# Altium PCB Optical Compressor.PcbDoc (part 1 of 2)
Units mm, origin at the board's own origin, x right, y up, seen from the top; angles counter-clockwise.
Board outline 100 x 100 mm, 2 copper layers (Top Layer, Bottom Layer); 101 components, 65 nets, 289 pads, 0 vias.
Unrouted connection lines stored in the file: 219.
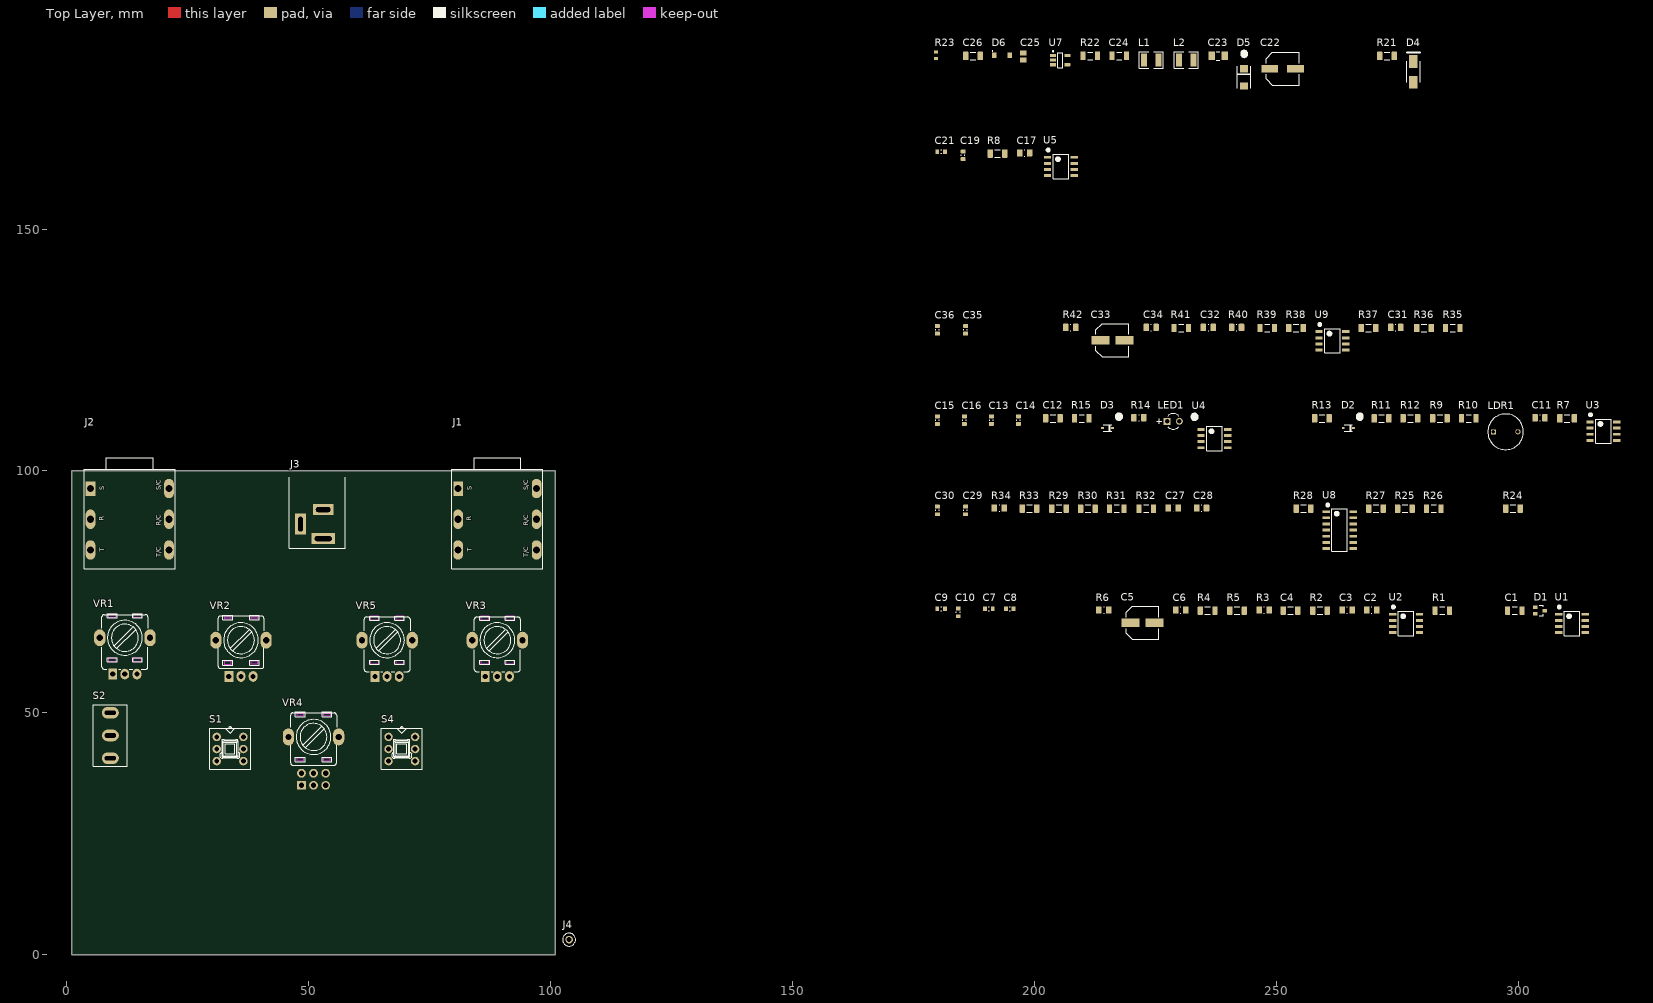
[diagram p0: Top Layer view]
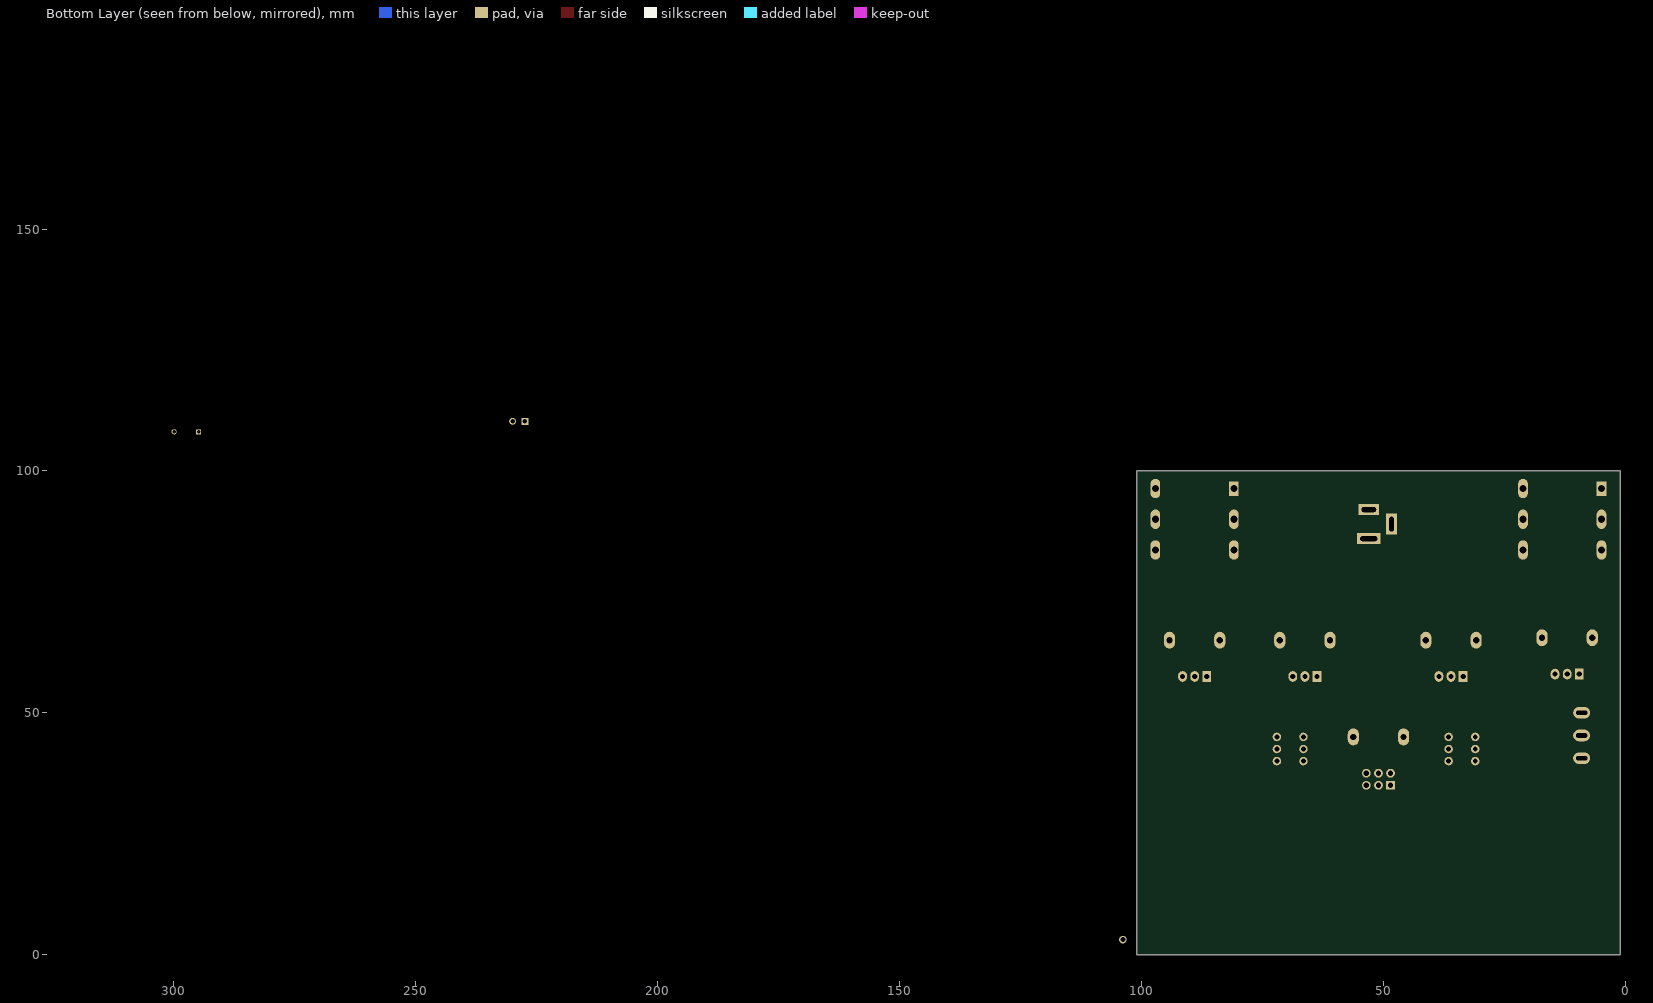
[diagram p1: Bottom Layer view, seen from below]

## Layer stack, top to bottom
Top Solder: solder mask 0.0102, Solder Resist, Dk 3.5
Top Layer: signal copper 0.0356
Dielectric 1: dielectric 0.32, FR-4, Dk 4.8
Bottom Layer: signal copper 0.0356
Bottom Solder: solder mask 0.0102, Solder Resist, Dk 3.5

## Board outline
1,0 101,0 101,100 1,100

## Design rules (kind name [scope] priority, off if disabled: settings)
Clearance [All] p1: gap=0.5 ignorepadtopadclearanceinfootprint=FALSE
PlaneConnect [All] p1: pad.planeconnectstyle=Relief pad.reliefexpansion=0.508 pad.reliefentries=4 pad.reliefconductorwidth=0.254 pad.reliefairgap=0.254 via.planeconnectstyle=NoConnect via.reliefexpansion=0.508 via.reliefentries=4 via.reliefconductorwidth=0.254 via.reliefairgap=0.254
PolygonConnect [All] p1: thpad.connectstyle=Relief thpad.reliefconductorwidth=0.254 thpad.reliefentries=4 thpad.polygonreliefangle="90 Angle" thpad.airgapwidth=0.254 smdpad.connectstyle=Relief smdpad.reliefconductorwidth=0.254 smdpad.reliefentries=4 smdpad.polygonreliefangle="90 Angle" smdpad.airgapwidth=0.254 via.connectstyle=NoConnect via.reliefconductorwidth=0.254 via.reliefentries=4 via.polygonreliefangle="90 Angle" via.airgapwidth=0.254
RoutingVias [All] p1: holewidth=0.6 width=0.3 viastyle="Through Hole" minholewidth=0.6 minwidth=0.3 maxholewidth=0.6 maxwidth=0.3
SolderMaskExpansion [All] p1: expansion=0.102 istentingtop=FALSE
UnRoutedNet [All] p1: checkbadconnections=TRUE
Width [All] p1: maxlimit=0.5 minlimit=0.5 preferedwidth=0.5
28 further rules are at their usual default settings.

## Classes and differential pairs
component class S6: C22 C23 C24 C25 C26 D4 D5 D6 J3 L1 L2 R21 R22 R23 U7
component class S5: C17 C19 C21 J2 R8 U5 VR3
component class S4: C31 C32 C33 C34 C35 C36 R35 R36 R37 R38 R39 R40 R41 R42 U9 VR5
component class S3: C11 C12 C13 C14 C15 C16 D2 D3 LDR1 LED1 R7 R9 R10 R11 R12 R13 R14 R15 U3 U4 VR2
component class S2: C27 C28 C29 C30 R24 R25 R26 R27 R28 R29 R30 R31 R32 R33 R34 S4 U8 VR4
component class S1: C1 C2 C3 C4 C5 C6 C7 C8 C9 C10 D1 J1 R1 R2 R3 R4 R5 R6 S2 U1 U2 VR1
component class Main: S1

## Components (designator, comment, footprint, x,y, rotation, side; value= is the part's Value field where it differs from the comment)
C1 "Cap 1206 100nF" 1206-CAP 299.339,71.12 r0 top value=100n
C2 "Cap 10nF 0805 C0G" 0805-CAP 269.748,71.247 r0 top
C3 "Cap 10nF 0805 C0G" 0805-CAP 264.668,71.247 r0 top
C4 "Cap 1206 100pF" 1206-CAP 252.984,71.12 r0 top value=100pF
C5 "Cap Pol 220uF" CAPAE6966X80M 222.377,68.58 r0 top value=220uF/25V
C6 "cap 0805 10pF" 0805-CAP 230.251,71.247 r0 top
C7 "Cap 0603 100nF 2" 0603-CAP 190.627,71.501 r0 top value=100n
C8 "Cap 0603 100nF 2" 0603-CAP 194.945,71.501 r0 top value=100n
C9 "Cap 0603 100nF 2" 0603-CAP 180.721,71.501 r0 top value=100n
C10 "Cap 0603 100nF 2" 0603-CAP 184.277,70.739 r90 top value=100n
C11 "Cap 10nF 0805 C0G" 0805-CAP 304.546,110.998 r0 top
C12 "Cap 1206 22uF" 1206-CAP 203.835,110.871 r0 top value=22uF
C13 "Cap 0603 100nF 2" 0603-CAP 191.135,110.49 r90 top value=100n
C14 "Cap 0603 100nF 2" 0603-CAP 196.723,110.49 r90 top value=100n
C15 "Cap 0603 100nF 2" 0603-CAP 179.959,110.49 r90 top value=100n
C16 "Cap 0603 100nF 2" 0603-CAP 185.547,110.49 r90 top value=100n
C17 "Cap 10nF 0805 C0G" 0805-CAP 197.993,165.735 r0 top
C19 "Cap 0603 100nF 2" 0603-CAP 185.293,165.227 r90 top value=100n
C21 "Cap 0603 100nF 2" 0603-CAP 180.721,165.989 r0 top value=100n
C22 "Cap pol 100µF 35V" "E-CAP, SMT, diameter 6.3mm, height 7.7mm" 251.333,183.134 r0 top
C23 "1uF" FP-1206-L_3_2_0_15-W_1_6-IPC_B 237.998,185.801 r0 top
C24 "Cap 1206 22uF 25V" 1206-CAP 217.551,185.801 r0 top value=22uF
C25 "330pF" CAPC2013X145X48LL20T23 197.739,185.674 r90 top
C26 "Cap 1206 22uF" 1206-CAP 187.325,185.801 r0 top value=22uF
C27 "Cap 10nF 0805 C0G" 0805-CAP 228.727,92.329 r0 top
C28 "Cap 10nF 0805 C0G" 0805-CAP 234.569,92.329 r0 top
C29 "Cap 0603 100nF 2" 0603-CAP 185.801,91.821 r90 top value=100n
C30 "Cap 0603 100nF 2" 0603-CAP 179.959,91.821 r90 top value=100n
C31 "Cap 10nF 0805 C0G" 0805-CAP 274.701,129.667 r0 top
C32 "Cap 10nF 0805 C0G" 0805-CAP 235.966,129.667 r0 top
C33 "Cap Pol 220uF" CAPAE6966X80M 216.154,127 r0 top value=220uF/25V
C34 "cap 0805 10pF" 0805-CAP 224.155,129.667 r0 top
C35 "Cap 0603 100nF 2" 0603-CAP 185.801,129.159 r90 top value=100n
C36 "Cap 0603 100nF 2" 0603-CAP 179.959,129.159 r90 top value=100n
D1 "BAT54SWT1G" ONSC-SOT-323-3-419-04_V 304.546,71.12 r0 top
D2 "1N4148WS-7-F" 1N4148WS-7-F 264.922,108.839 r0 top
D3 "1N4148WS-7-F" 1N4148WS-7-F 215.138,108.839 r0 top
D4 "SS14" SS14 278.384,182.499 r90 top
D5 "SML4742-E3/5A" DO-214AC 243.332,179.578 r90 top
D6 "MBR0520-TP" SODFL370X135-2N 193.294,185.928 r0 top
J1 "Jack NMJ6HCD2" "Neutrik Jack metal nut" 89,90 r90 top
J2 "Jack NMJ6HCD2" "Neutrik Jack metal nut" 13,90 r90 top
J3 "DC Jack TH" DC_Jack 53.127,89.374 r270 top
J4 "5001" FP-5001-MFG 103.83,3.1 r0 top
L1 "BCL322515RT-150M-D" "1210 SMD Cap" 224.155,184.912 r0 top
L2 "BCL322515RT-150M-D" "1210 SMD Cap" 231.394,184.912 r0 top
LDR1 "NSL-5910" FB_28C0236-0JW-10 297.434,108.077 r0 top
LED1 "LED 3mm RED" KING-WP710A10QBCD_V 228.727,110.236 r0 top
R1 "Res 1k 1% 1206" 1206-RES 284.353,71.12 r0 top
R2 "Res 1M 1% 1206" 1206-RES 259.08,71.12 r0 top
R3 "Res 0805 330k 1%" 0805-RES 247.523,71.247 r0 top value=330k
R4 "Res 100k 1% 1206" 1206-RES 235.839,71.12 r0 top
R5 "Res 100k 1% 1206" 1206-RES 241.935,71.12 r0 top
R6 "Res 3.3k 1% 0805" 0805-RES 214.376,71.247 r0 top
R7 "Res 100k 1% 1206" 1206-RES 310.134,110.871 r0 top
R8 "Res 100R 1% 1206" 1206-RES 192.405,165.608 r0 top
R9 "Res 100k 1% 1206" 1206-RES 283.845,110.871 r0 top
R10 "Res 100k 1% 1206" 1206-RES 289.814,110.871 r0 top
R11 "Res 33k 0.1% 1206" 1206-RES 271.78,110.871 r0 top
R12 "Res 100k 1% 1206" 1206-RES 277.749,110.871 r0 top
R13 "Res 100k 1% 1206" 1206-RES 259.461,110.871 r0 top
R14 "Res 10k 0.1% 0805" 0805-RES 221.615,110.998 r0 top
R15 "Res 680R 5% 1206" 1206-RES 209.804,110.871 r0 top
R21 "Res 10R 1% 1206" 1206-RES 272.923,185.801 r0 top
R22 "Res 30k 5% 1206" 1206-RES 211.582,185.801 r0 top
R23 "RC0603FR-074K7L" RESC1608X55X25LL10T15 179.705,185.928 r90 top
R24 "Res 5.6k 0.1% 1206" 1206-RES 298.958,92.202 r0 top
R25 "Res 5.6k 0.1% 1206" 1206-RES 276.606,92.202 r0 top
R26 "Res 100R 1% 1206" 1206-RES 282.575,92.202 r0 top
R27 "Res 100R 1% 1206" 1206-RES 270.637,92.202 r0 top
R28 "Res 5.6k 0.1% 1206" 1206-RES 255.651,92.202 r0 top
R29 "Res 3.3k 1% 1206" 1206-RES 205.105,92.202 r0 top
R30 "Res 3.3k 1% 1206" 1206-RES 211.074,92.202 r0 top
R31 "Res 5.6k 0.1% 1206" 1206-RES 217.043,92.202 r0 top
R32 "Res 5.6k 0.1% 1206" 1206-RES 223.139,92.202 r0 top
R33 "Res 5.6k 0.1% 1206" 1206-RES 199.009,92.202 r0 top
R34 "Res 11.3k 1% 0805" 0805-RES 192.786,92.329 r0 top
R35 "Res 10k 0.1% 1206" 1206-RES 286.512,129.54 r0 top
R36 "Res 2.2k 0.1% 1206" 1206-RES 280.543,129.54 r0 top
R37 "Res 1k 0.1% 1206" 1206-RES 269.113,129.54 r0 top
R38 "Res 2.2k 0.1% 1206" 1206-RES 254.127,129.54 r0 top
R39 "Res 10k 0.1% 1206" 1206-RES 248.158,129.54 r0 top
R40 "Res 0805 330k 1%" 0805-RES 241.808,129.667 r0 top value=330k
R41 "Res 2.2k 0.1% 1206" 1206-RES 230.378,129.54 r0 top
R42 "Res 3.3k 1% 0805" 0805-RES 207.518,129.667 r0 top
S1 "Push Vertical Latching" "PUSH VERTICAL DPDT" 33.75,42.5 r0 top
S2 "Switch SPDT toggle" "Switch SPDT" 9,45.3 r0 top
S4 "Push Vertical Latching" "PUSH VERTICAL DPDT" 69.25,42.5 r0 top
U1 "TL072CD" SOIC8-127P600X175-8N 311.15,68.453 r0 top
U2 "OPA1688IDR" SOIC8-127P600X175-8N 276.86,68.453 r0 top
U3 "TL072CD" SOIC8-127P600X175-8N 317.627,108.204 r0 top
U4 "TL072CD" SOIC8-127P600X175-8N 237.236,106.68 r0 top
U5 "OPA1688IDR" SOIC8-127P600X175-8N 205.486,162.941 r0 top
U7 "LM2611BMF/NOPB" DBV0005A_M 205.359,184.912 r0 top
U8 "MC33179D" SOIC14-127P600X175-14N 263.144,87.757 r0 top
U9 "TL072CD" SOIC8-127P600X175-8N 261.62,126.873 r0 top
VR1 "Pot100kC 9mm" "LJV 9mm pot"#1 12,65.5 r0 top value=100kC
VR2 "Pot100kA 9mm" "LJV 9mm pot"#2 36,65 r0 top value=100kA
VR3 "Pot100kC 9mm D-Shaft" "LJV 9mm pot"#1 89,65 r0 top value=100kC
VR4 "Pot100kC DUAL LJV" "LJV 9MM DUAL" 51,45 r0 top value=100kC
VR5 "Pot100kC 9mm" "LJV 9mm pot"#1 66.2,65 r0 top value=100kC

## Footprints (in the part's own frame and the unit in brackets; to place one, negate y for a bottom-side part, rotate by r counter-clockwise, add the part's x,y. Pads: shape width x height; smd on the part's side, far side on the other; paste and mask are expansions set on the pad)
1N4148WS-7-F [mm] "SOD-323, 2-Leads, Body 1.7x1.3mm"
  rect 0.59x0.45 smd: 1(-1.055,0) 2(1.055,0)
  silkscreen extent -0.85,-0.65 3.1,3.13, body extent -0.85,-0.65 0.85,0.65, height 1.2
0603-CAP [mm] "Chip Capacitor, 2-Leads, Body 1.6x0.8mm, IPC Medium Density"
  rrect25% 0.8x1 smd: 1(-0.787,0) 2(0.787,0)
  silkscreen extent -0.1,-0.38 0.1,0.38, body extent -0.85,-0.45 0.85,0.45, height 0.9
0805-CAP [mm] "Chip Capacitor, 2-Leads, Body 2.00x1.25mm, IPC Low Density"
  rrect25% 1.15x1.5 smd: 1(-1.025,0) 2(1.025,0)
  silkscreen extent -0.05,-0.65 0.05,0.65, body extent -1.05,-0.67 1.05,0.68, height 1.35
0805-RES [mm] "Chip Resistor, 2-Leads, Body 2.00x1.25mm, IPC Low Density"
  rrect25% 1.15x1.5 smd: 1(-1.025,0) 2(1.025,0)
  silkscreen extent -0.05,-0.65 0.05,0.65, body extent -1.05,-0.67 1.05,0.68, height 0.6
1206-CAP [mm] "Chip Capacitor, 2-Leads, Body 3,20x1,60mm, IPC Medium Density"
  rrect25% 1.1x1.75 smd: 1(-1.5,0) 2(1.5,0)
  silkscreen extent -0.55,-0.77 0.55,0.77, body extent -1.7,-0.9 1.7,0.9, height 1.8
1206-RES [mm] "Chip Resistor, 2-Leads, Body 3,20x1,60mm, IPC Medium Density"
  rrect25% 1.1x1.75 smd: 1(-1.5,0) 2(1.5,0)
  silkscreen extent -0.55,-0.77 0.55,0.77, body extent -1.65,-0.85 1.65,0.85, height 0.65
"1210 SMD Cap" [mm] "Old footprint"
  rect 1.2x2.7 smd: 1(-1.5,0) 2(1.5,0)
  silkscreen extent -2.5,-1.7 2.5,1.7, body extent -1.6,-1.25 1.6,1.25, height 0.78
CAPAE6966X80M [mm] "Aluminum Electrolytic Capacitor, Body 6,60x6,60x8,00mm, IPC Low Density"
  rect 3.7x1.8 smd: 1(-2.5,0) 2(2.5,0)
  silkscreen extent -3.4,-3.4 3.4,3.4, body extent -3.45,-3.4 3.45,3.4, height 8
CAPC2013X145X48LL20T23 [mm] "Chip Capacitor, 2-Leads, Body 2.00x1.25mm, IPC High Density"
  rect 1.1x1.35 smd: 1(-0.725,0) 2(0.725,0)
  body extent -1.1,-0.72 1.1,0.72, height 1.45
DBV0005A_M [mm] "SOT23, 5-Leads, Body 3.05x1.75mm, Pitch 0.95mm, IPC Low Density"
  rrect15% 1.2x0.65 smd: 1(-1.475,0.95) 2(-1.475,0) 3(-1.475,-0.95) 4(1.475,-0.95) 5(1.475,0.95)
  silkscreen extent -1.6,-1.55 0.5,1.95, body extent -1.42,-1.46 1.42,1.46, height 1.08
DC_Jack [mm]
  rect 2.3x4.8 hole 1 slot 3.5 at 90 deg: 1(3.374,-0.127)
  rect 2.3x4.3 hole 1 slot 3 at 90 deg: 2(-2.626,-0.127)
  rect 4.3x2.3 hole 1 slot 3 at 0 deg: 3(0.374,-4.827)
  silkscreen extent -9.33,-7.11 5.41,4.44, body extent -10.3,-5.01 4.1,4.39, height 11
DO-214AC [mil]
  rect 60x66 smd: 1(0,0) 2(140,0)
  silkscreen extent -20,-55 290,55
"E-CAP, SMT, diameter 6.3mm, height 7.7mm" [mm] "Aluminum Electrolytic Capacitor, Body 6,60x6,60x8,00mm, IPC Medium Density"
  rect 3.45x1.65 smd: 1(-2.675,0) 2(2.675,0)
  silkscreen extent -3.4,-3.4 3.4,3.4, body extent -3.4,-3.4 3.4,3.4, height 8
FB_28C0236-0JW-10 [mm]
  rect 1.06x1.06 hole 0.71: 1(-2.54,0)
  round 1.06 hole 0.71: 2(2.54,0)
  silkscreen extent -3.68,-3.68 3.68,3.68
FP-1206-L_3_2_0_15-W_1_6-IPC_B [mm]
  rect 1.355x1.758 smd paste+0 mask+0: 1(-1.351,0) 2(1.351,0)
  silkscreen extent -0.37,-0.88 0.37,0.88, body extent -2.28,-1.13 2.28,1.13, height 0.25
FP-5001-MFG [mm]
  round 1.57 hole 1.016 paste-1000 mask+0: 1(0,0)
  silkscreen extent -1.35,-1.34 1.35,1.34, body extent -1.45,-1.45 1.45,1.45, height 0.25
KING-WP710A10QBCD_V [mm] "THD, 2-Leads, Dia 3.2mm"
  rect 1.4x1.4 hole 0.889 paste-0.025: 1(-1.27,0)
  round 1.4 hole 0.889 paste-0.025: 2(1.27,0)
  silkscreen extent -3.39,-1.6 1.16,1.6, body extent -1.62,-1.6 1.62,1.6, height 14.1
"LJV 9MM DUAL" [mm]
  rect 1.8x1.8 hole 1.1: 1(-2.5,-10)
  round 1.8 hole 1.1: 2(0,-10) 3(2.5,-10) 4(-2.5,-7.5) 5(0,-7.5) 6(2.5,-7.5)
  oval 2.3x3.5 hole 1.3: 7(-5.2,0) 8(5.2,0)
  Top Layer keep-out region: -2,4.75 -3.5,4.75 -3.5,4.4 -2,4.4
  Top Layer keep-out region: 3.525,4.75 2.025,4.75 2.025,4.4 3.525,4.4
  Top Layer keep-out region: 3.475,-4.375 2,-4.375 2,-4.9 3.475,-4.9
  Top Layer keep-out region: -2.025,-4.4 -3.475,-4.4 -3.475,-4.953 -2.025,-4.953
  silkscreen extent -4.75,-5.85 4.75,5.2, body extent -6.05,-7.8 6.05,4.8, height 23
"LJV 9mm pot"#1 [mm]
  rect 1.8x2.2 hole 1.1: 1(-2.5,-7.5)
  oval 1.8x2.2 hole 1.1: 2(0,-7.5) 3(2.5,-7.5)
  oval 2.3x3.5 hole 1.3: 4(-5.2,0) 5(5.2,0)
  Top Layer keep-out region: 1.751,4.2 3.451,4.2 3.451,4.9 1.751,4.9
  Top Layer keep-out region: -1.75,-4.199 -3.45,-4.199 -3.45,-4.899 -1.75,-4.899
  Top Layer keep-out region: 1.751,-4.899 3.451,-4.899 3.451,-4.199 1.751,-4.199
  Top Layer keep-out region: -1.75,4.9 -3.45,4.9 -3.45,4.2 -1.75,4.2
  silkscreen extent -4.75,-6.5 4.75,5, body extent -6.05,-7.8 6.05,4.8, height 23
"LJV 9mm pot"#2 [mm]
  rect 1.8x2.2 hole 1.1: 1(-2.5,-7.5)
  oval 1.8x2.2 hole 1.1: 2(0,-7.5) 3(2.5,-7.5)
  oval 2.3x3.5 hole 1.3: 4(-5.2,0) 5(5.2,0)
  Top Layer keep-out region: -2.025,-4.4 -3.475,-4.4 -3.475,-4.953 -2.025,-4.953
  Top Layer keep-out region: 3.475,-4.375 2,-4.375 2,-4.9 3.475,-4.9
  Top Layer keep-out region: 3.525,4.75 2.025,4.75 2.025,4.4 3.525,4.4
  Top Layer keep-out region: -2,4.75 -3.5,4.75 -3.5,4.4 -2,4.4
  silkscreen extent -4.75,-5.85 4.75,5.2, body extent -6.05,-7.8 6.05,4.8, height 23
"Neutrik Jack metal nut" [mm] "EMI Screen partno FCR14422"
  rect 3x2 hole 1.5: 1(6.35,8.115)
  oval 4x2 hole 1.5: 2(0,8.115) 3(-6.35,8.115) 4(-6.35,-8.115) 5(0,-8.115) 6(6.35,-8.115)
  silkscreen extent -10.25,-9.39 12.7,9.42, body extent -13.2,-9.1 18.6,9.1, height 15.93
ONSC-SOT-323-3-419-04_V [mm] "SOT23, 3-Leads, Body 2x1.25mm, Pitch 0.65mm"
  rect 0.9x0.7 smd: 1(-0.95,0.65) 2(-0.95,-0.65) 3(0.95,0)
  silkscreen extent -0.11,-1.1 0.63,1.1, body extent -0.63,-1 0.63,1, height 1
"PUSH VERTICAL DPDT" [mm]
  round 1.75 hole 1: 1(-2.75,0) 2(-2.75,2.5) 3(-2.75,-2.5) 4(2.75,0) 5(2.75,2.5) 6(2.75,-2.5)
  silkscreen extent -4.25,-4.2 4.25,4.6, body extent -4.25,-4.25 4.25,4.55, height 14.2
RESC1608X55X25LL10T15 [mm] "Chip Resistor, 2-Leads, Body 1.60x0.80mm, IPC High Density"
  rect 0.6x0.8 smd: 1(-0.65,0) 2(0.65,0)
  body extent -0.85,-0.45 0.85,0.45, height 0.55
SODFL370X135-2N [mm] "SODFL, 2-Leads, Body 1.60x3.70mm, IPC Medium Density"
  rect 0.91x1.22 smd: 1(1.6,0) 2(-1.6,0)
  silkscreen extent -2,0.86 -1.91,0.96, body extent -1.42,-0.9 1.43,0.9, height 1.35
SOIC8-127P600X175-8N [mm] "SOIC, 8-Leads, Body 4,90x3,90mm, Pitch 1,27mm, IPC Medium Density"
  rect 1.52x0.6 smd: 1(-2.76,1.905) 2(-2.76,0.635) 3(-2.76,-0.635) 4(-2.76,-1.905) 5(2.76,-1.905) 6(2.76,-0.635) 7(2.76,0.635) 8(2.76,1.905)
  silkscreen extent -2.75,-2.5 1.6,3.52, body extent -3,-2.5 3,2.5, height 1.75
SOIC14-127P600X175-14N [mm] "SOIC, 14-Leads, Body 8,65x3,90mm, Pitch 1,27mm, IPC Medium Density"
  rect 1.52x0.58 smd: 1(-2.76,3.81) 2(-2.76,2.54) 3(-2.76,1.27) 4(-2.76,0) 5(-2.76,-1.27) 6(-2.76,-2.54) 7(-2.76,-3.81) 8(2.76,-3.81) 9(2.76,-2.54) 10(2.76,-1.27) 11(2.76,0) 12(2.76,1.27) 13(2.76,2.54) 14(2.76,3.81)
  silkscreen extent -2.6,-4.4 1.6,5.32, body extent -3,-4.4 3,4.4, height 1.75
SS14 [mm] "DO-214, 2-Leads, Body 4.375x2.725mm"
  rect 2.65x1.75 smd: A(-2.15,0) K(2.15,0)
  silkscreen extent -2.19,-1.36 3.98,1.36, body extent -2.19,-1.36 2.19,1.36, height 2.5
"Switch SPDT" [mm] "Red SPDT on Ultra"
  oval 3.5x2.4 hole 0.9 slot 2.3 at 0 deg: 1(0,4.7) 2(0,0) 3(0,-4.7)
  silkscreen extent -3.5,-6.35 3.5,6.35, body extent -3.5,-6.35 3.5,6.35, height 28.8

## Part data
C1: library part CMP-019-0095-11, "100nF, 100V, COG, 5%", Capacitance=100nF, Dielectric=C0G, Tolerance=5%, Voltage Rating (DC)=100V, ComponentLink1Description=http://search.murata.co.jp/Ceramy/image/img/A01X/G101/ENG/GRM31C5C2A104JA01-01.pdf?src-supplier=Digi-Key, ComponentLink1URL=http://search.murata.co.jp/Ceramy/image/img/A01X/G101/ENG/GRM31C5C2A104JA01-01.pdf?src-supplier=Digi-Key, Design Item ID="Cap 1206 100nF", Fit component=Fit, LatestRevisionDate=29-May-2009, LatestRevisionNote="IPC-7351 Footprint Added.", Length=3.2mm, Mouser part=81-GRM31C5C2A104JA1L, PackageDescription="Chip Capacitor", PackageReference=C1206, Pricing 1="1 = 0,66000, 10 = 0,46400, 50 = 0,46400, 100 = 0,36700, 1000 = 0,23100, 10000 = 0,14700 (USD)", Published=8-Jun-2000, Publisher="Altium Limited", RoHS=No, Source=main.SchLib, Stock 1=1016, Thickness=1.6mm, Width=1.6mm
C2 C3 C11 C17 C27 C28 C31 C32: library part CMP-04096-2, "Cap 10nF 0805 C0G 50V +-5%", Capacitance=10nF, Dielectric=C0G, Maximum operating temperature=125°C, Rated Voltage=50V, Tolerance (+-)=5%, Height=950µm, Size (Imperial)=0805
C4: library part CMP-04086-2, "Cap 100pF 0603 C0G 50V +-5%", Created=23/06/2006, Design Item ID="Cap 1206 100pF", LatestRevisionDate=29-May-2009, LatestRevisionNote="IPC-7351 Footprint Added.", PackageDescription="Chip Capacitor", PackageReference=C1206, Published=8-Jun-2000, Publisher="Altium Limited", Source=main.SchLib
C5: library part CMP-00120-4, "Cap Aluminum 220uF 35V ±20% (10x10.2mm) SMD 2000h 85°C", Capacitance=220uF, Case/Package=Radial, Dielectric Material=Aluminium, ESR (Equivalent Series Resistance)=160mR, Leakage Current=55uA, Manufacturer=Panasonic, Manufacturer Part Number=EEEFTE221XAP, Max Operating Temperature=105°C, Min Operating Temperature=-55°C, Package Quantity=1, Ripple Current=600mA, Tolerance=20%, Voltage=25V, ComponentLink1Description=https://datasheet.ciiva.com/11777/0900766b80f4973e-11777908.pdf?src-supplier=RSComponents, ComponentLink1URL=https://datasheet.ciiva.com/11777/0900766b80f4973e-11777908.pdf?src-supplier=RSComponents, ComponentLink2Description=https://datasheet.ciiva.com/16433/eee-ft1e471ap-16433448.pdf?src-supplier=Future+Electronics, ComponentLink2URL=https://datasheet.ciiva.com/16433/eee-ft1e471ap-16433448.pdf?src-supplier=Future+Electronics, ComponentLink3Description=https://datasheet.ciiva.com/2985/aba0000ce135-2985602.pdf?src-supplier=Avnet, ComponentLink3URL=https://datasheet.ciiva.com/2985/aba0000ce135-2985602.pdf?src-supplier=Avnet, ComponentLink4Description=https://datasheet.ciiva.com/6025/1790597-6025848.pdf?src-supplier=Farnell, ComponentLink4URL=https://datasheet.ciiva.com/6025/1790597-6025848.pdf?src-supplier=Farnell, ComponentLink5Description=https://datasheet.ciiva.com/30207/aba0000ce135-30207481.pdf?src-supplier=Onlinecomponents.com, ComponentLink5URL=https://datasheet.ciiva.com/30207/aba0000ce135-30207481.pdf?src-supplier=Onlinecomponents.com, ComponentLink6Description=https://datasheet.ciiva.com/46385/1790597-46385754.pdf?src-supplier=Element14, ComponentLink6URL=https://datasheet.ciiva.com/46385/1790597-46385754.pdf?src-supplier=Element14, ComponentLink7Description=https://datasheet.ciiva.com/10331/aba0000ce135-10331099.pdf?src-supplier=Avnet, ComponentLink7URL=https://datasheet.ciiva.com/10331/aba0000ce135-10331099.pdf?src-supplier=Avnet, ComponentLink8Description=https://datasheet.ciiva.com/17534/aba0000ce135-17534091.pdf?src-supplier=Avnet+Europe, ComponentLink8URL=https://datasheet.ciiva.com/17534/aba0000ce135-17534091.pdf?src-supplier=Avnet+Europe, ComponentLink9Description=https://datasheet.ciiva.com/28678/1244238-28678971.pdf?src-supplier=Element14, ComponentLink9URL=https://datasheet.ciiva.com/28678/1244238-28678971.pdf?src-supplier=Element14, ComponentLink10Description=https://datasheet.ciiva.com/48523/smd-ft-eng-tds-48523629.pdf?src-supplier=Distrelec, ComponentLink10URL=https://datasheet.ciiva.com/48523/smd-ft-eng-tds-48523629.pdf?src-supplier=Distrelec, Contact Plating=Tin, Design Item ID="Cap Pol 220uF", Diameter=6.3mm, Height=7.7mm, Height - Seated (Max)=0.315inch, Lead Diameter=0.65mm, Lead Free="Lead Free", Lead Pitch=1.8mm, Length=7.7mm, Life (Hours)=2000Hour, Mount="Surface Mount", Number of Pins=8, Packaging="Tape and Reel", Pricing 1="1 = 0.76000, 10 = 0.56300, 100 = 0.38580 (USD)", Radiation Hardening=No, REACH SVHC="No SVHC", Ripple Current (AC)=600mA, RoHS=Yes, Source=main.SchLib, Stock 1=366479, Termination=SMD/SMT, Voltage Rating=25V, Voltage Rating (DC)=25V
C6 C34: library part CMP-019-0194-1, "Ceramic Capacitor, Multilayer, Ceramic, 25V, 5% +Tol, 5% -Tol, C0G, -/+30ppm/Cel TC, 0.00001uF, Surface Mount, 0805", Capacitance=10pF, Capacitor Type=Ceramic, Manufacturer Series=VJ, Max Operating Temperature=125°C, Min Operating Temperature=-55°C, Negative Tolerance=5%, Package Shape=Rectangular, Rated DC Voltage (URdc)=25V, Temperature Characteristics Code=C0G, Dielectric Material=Ceramic, JESD-609 Code=e3, Mount="Surface Mount", Multilayer=Yes, Number of Pins=2, Packaging="Tape and Reel", Positive Tolerance=5%, REACH SVHC=Yes, RoHS Compliant=Yes, Size Code=0805, Terminal Finish=Tin, Termination=Wraparound
C7 C8 C9 C10 C13 C14 C15 C16 C19 C30: library part CMP-019-0095-11, "100nF, 100V, COG, 5%", Capacitance=100nF, Case Code (Imperial)=0603, Case Code (Metric)=1608, Dielectric=X7R, Max Operating Temperature=125°C, Min Operating Temperature=-55°C, Package Quantity=1, Ratings=AEC-Q200, Tolerance=10%, Voltage Rating=50V, Case/Package=0603, ComponentLink1Description=https://datasheet.ciiva.com/11618/product-11618920.pdf?src-supplier=Avnet, ComponentLink1URL=https://datasheet.ciiva.com/11618/product-11618920.pdf?src-supplier=Avnet, ComponentLink2Description=https://datasheet.ciiva.com/29540/product-29540815.pdf?src-supplier=Digi-Key, ComponentLink2URL=https://datasheet.ciiva.com/29540/product-29540815.pdf?src-supplier=Digi-Key, Depth=0.8mm, Design Item ID="Cap 0603 100nF 2", Height=0.8mm, LatestRevisionDate=29-May-2009, LatestRevisionNote="IPC-7351 Footprint Added.", Lead Free="Lead Free", Length=1.6mm, Mount="Surface Mount", Mouser part=81-GCM188R71H104KA7J, PackageDescription="Chip Capacitor", PackageReference=C1206, Packaging="Tape and Reel", Pricing 1="1=0,31000, 10=0,20900, 50=0,20900, 100=0,11800, 500=0,08300, 1000=0,07300, 2500=0,06400, 5000=0,06000, 10000=0,05300, 20000=0,04800 (USD)", Published=8-Jun-2000, Publisher="Altium Limited", Radiation Hardening=No, RoHS=Yes, Source=main.SchLib, Stock 1=2776503, Termination=SMD/SMT, Thickness=0.035inch, Voltage Rating (DC)=50V, Width=0.031inch
C12 C26: library part CMP-019-0043-11, "22uF, 25V, X5R, 20%", Capacitance=22uF, Case Code (Imperial)=1206, Case Code (Metric)=3216, Dielectric=X5R, Max Operating Temperature=85°C, Min Operating Temperature=-55°C, Tolerance=20%, Voltage Rating=25V, Case/Package=1206, Design Item ID="Cap 1206 22uF", Length=0.126inch, Mount="Surface Mount", Packaging="Tape and Reel", Pricing 1="1 = 0.72000, 10 = 0.51900, 50 = 0.51900, 100 = 0.34200, 1000 = 0.21500, 10000 = 0.15900 (USD)", RoHS=Yes, Source=main.SchLib, Stock 1=409, Thickness=0.02inch, Voltage Rating (DC)=25V, Width=0.063inch
C21: library part CMP-019-0043-11, "22uF, 25V, X5R, 20%", Capacitance=100nF, Case Code (Imperial)=0603, Case Code (Metric)=1608, Dielectric=X7R, Max Operating Temperature=125°C, Min Operating Temperature=-55°C, Package Quantity=1, Ratings=AEC-Q200, Tolerance=10%, Voltage Rating=50V, Case/Package=0603, ComponentLink1Description=https://datasheet.ciiva.com/11618/product-11618920.pdf?src-supplier=Avnet, ComponentLink1URL=https://datasheet.ciiva.com/11618/product-11618920.pdf?src-supplier=Avnet, ComponentLink2Description=https://datasheet.ciiva.com/29540/product-29540815.pdf?src-supplier=Digi-Key, ComponentLink2URL=https://datasheet.ciiva.com/29540/product-29540815.pdf?src-supplier=Digi-Key, Depth=0.8mm, Design Item ID="Cap 0603 100nF 2", Height=0.8mm, LatestRevisionDate=29-May-2009, LatestRevisionNote="IPC-7351 Footprint Added.", Lead Free="Lead Free", Length=1.6mm, Mount="Surface Mount", Mouser part=81-GCM188R71H104KA7J, PackageDescription="Chip Capacitor", PackageReference=C1206, Packaging="Tape and Reel", Pricing 1="1=0,31000, 10=0,20900, 50=0,20900, 100=0,11800, 500=0,08300, 1000=0,07300, 2500=0,06400, 5000=0,06000, 10000=0,05300, 20000=0,04800 (USD)", Published=8-Jun-2000, Publisher="Altium Limited", Radiation Hardening=No, RoHS=Yes, Source=main.SchLib, Stock 1=2776503, Termination=SMD/SMT, Thickness=0.035inch, Voltage Rating (DC)=50V, Width=0.031inch
C22: library part CMP-00119-4, "Cap Aluminum 100uF 35V ±20% (6.3x7.7mm) SMD 2000h 85°C", + Tolerance=20%, Capacitance=100µF, Lifetime @ Max. Temp. (hours)=2000h, Maximum operating temperature=85°C, Rated Voltage=35V, - Tolerance=20%
C23: library part CMP-019-0066-14, "330pF,  5%,  50V,  C0G", Case Code (Imperial)=1206, Case Code (Metric)=3216, Dielectric=X5R, Max Operating Temperature=85°C, Min Operating Temperature=-55°C, Package Quantity=2000, Ratings=AEC-Q200, Tolerance=10%, Voltage Rating=35V, Capacitance=1uF, Case/Package=1206, Halogen Free="Halogen Free", Height=1.6mm, Lead Free="Lead Free", Length=0.126inch, Mount="Surface Mount", Packaging="Tape and Reel", RoHS Compliant=Yes, Termination=SMD/SMT, Thickness=0.071inch, Voltage Rating (DC)=35V, Width=0.063inch
C24: library part CMP-019-0095-11, "100nF, 100V, COG, 5%", Capacitance=22uF, Case Code (Imperial)=1206, Case Code (Metric)=3216, Dielectric=X5R, Max Operating Temperature=85°C, Min Operating Temperature=-55°C, Package Quantity=2000, Tolerance=20%, Voltage Rating=25V, Case/Package=1206, ComponentLink1Description=https://datasheet.ciiva.com/6278/tmk316bbj226ml-t-ss-6278743.pdf?src-supplier=Digi-Key, ComponentLink1URL=https://datasheet.ciiva.com/6278/tmk316bbj226ml-t-ss-6278743.pdf?src-supplier=Digi-Key, ComponentLink2Description=https://datasheet.ciiva.com/30253/23tmk316bbj226ml-t-30253929.pdf?src-supplier=Onlinecomponents.com, ComponentLink2URL=https://datasheet.ciiva.com/30253/23tmk316bbj226ml-t-30253929.pdf?src-supplier=Onlinecomponents.com, ComponentLink3Description=https://datasheet.ciiva.com/15922/5tmk316bbj226ml-t-15922410.pdf?src-supplier=Onlinecomponents.com, ComponentLink3URL=https://datasheet.ciiva.com/15922/5tmk316bbj226ml-t-15922410.pdf?src-supplier=Onlinecomponents.com, Composition=Ceramic, Design Item ID="Cap 1206 22uF 25V", Halogen Free="Halogen Free", Height=1.6mm, Length=3.2mm, Mount="Surface Mount", Packaging="Tape and Reel", Pricing 1="1=0,58000, 10=0,40900, 100=0,26900, 500=0,19900, 1000=0,16900, 2000=0,13800 (USD)", RoHS=Yes, Source=jimi.SchLib, Stock 1=156536, Termination=SMD/SMT, Thickness=0.075inch, Voltage Rating (DC)=25V, Weight=0.000571oz, Width=0.063inch
C25: library part CMP-019-0095-11, "100nF, 100V, COG, 5%", Manufacturer=Vitramon, Part Number=VJ0805D331KXPAJ
C29: library part CMP-00120-4, "Cap Aluminum 220uF 35V ±20% (10x10.2mm) SMD 2000h 85°C", Capacitance=100nF, Case Code (Imperial)=0603, Case Code (Metric)=1608, Dielectric=X7R, Max Operating Temperature=125°C, Min Operating Temperature=-55°C, Package Quantity=1, Ratings=AEC-Q200, Tolerance=10%, Voltage Rating=50V, Case/Package=0603, ComponentLink1Description=https://datasheet.ciiva.com/11618/product-11618920.pdf?src-supplier=Avnet, ComponentLink1URL=https://datasheet.ciiva.com/11618/product-11618920.pdf?src-supplier=Avnet, ComponentLink2Description=https://datasheet.ciiva.com/29540/product-29540815.pdf?src-supplier=Digi-Key, ComponentLink2URL=https://datasheet.ciiva.com/29540/product-29540815.pdf?src-supplier=Digi-Key, Depth=0.8mm, Design Item ID="Cap 0603 100nF 2", Height=0.8mm, LatestRevisionDate=29-May-2009, LatestRevisionNote="IPC-7351 Footprint Added.", Lead Free="Lead Free", Length=1.6mm, Mount="Surface Mount", Mouser part=81-GCM188R71H104KA7J, PackageDescription="Chip Capacitor", PackageReference=C1206, Packaging="Tape and Reel", Pricing 1="1=0,31000, 10=0,20900, 50=0,20900, 100=0,11800, 500=0,08300, 1000=0,07300, 2500=0,06400, 5000=0,06000, 10000=0,05300, 20000=0,04800 (USD)", Published=8-Jun-2000, Publisher="Altium Limited", Radiation Hardening=No, RoHS=Yes, Source=main.SchLib, Stock 1=2776503, Termination=SMD/SMT, Thickness=0.035inch, Voltage Rating (DC)=50V, Width=0.031inch
C33: library part CMP-019-0095-11, "100nF, 100V, COG, 5%", Capacitance=220uF, Case/Package=Radial, Dielectric Material=Aluminium, ESR (Equivalent Series Resistance)=160mR, Leakage Current=55uA, Manufacturer=Panasonic, Manufacturer Part Number=EEEFTE221XAP, Max Operating Temperature=105°C, Min Operating Temperature=-55°C, Package Quantity=1, Ripple Current=600mA, Tolerance=20%, Voltage=25V, ComponentLink1Description=https://datasheet.ciiva.com/11777/0900766b80f4973e-11777908.pdf?src-supplier=RSComponents, ComponentLink1URL=https://datasheet.ciiva.com/11777/0900766b80f4973e-11777908.pdf?src-supplier=RSComponents, ComponentLink2Description=https://datasheet.ciiva.com/16433/eee-ft1e471ap-16433448.pdf?src-supplier=Future+Electronics, ComponentLink2URL=https://datasheet.ciiva.com/16433/eee-ft1e471ap-16433448.pdf?src-supplier=Future+Electronics, ComponentLink3Description=https://datasheet.ciiva.com/2985/aba0000ce135-2985602.pdf?src-supplier=Avnet, ComponentLink3URL=https://datasheet.ciiva.com/2985/aba0000ce135-2985602.pdf?src-supplier=Avnet, ComponentLink4Description=https://datasheet.ciiva.com/6025/1790597-6025848.pdf?src-supplier=Farnell, ComponentLink4URL=https://datasheet.ciiva.com/6025/1790597-6025848.pdf?src-supplier=Farnell, ComponentLink5Description=https://datasheet.ciiva.com/30207/aba0000ce135-30207481.pdf?src-supplier=Onlinecomponents.com, ComponentLink5URL=https://datasheet.ciiva.com/30207/aba0000ce135-30207481.pdf?src-supplier=Onlinecomponents.com, ComponentLink6Description=https://datasheet.ciiva.com/46385/1790597-46385754.pdf?src-supplier=Element14, ComponentLink6URL=https://datasheet.ciiva.com/46385/1790597-46385754.pdf?src-supplier=Element14, ComponentLink7Description=https://datasheet.ciiva.com/10331/aba0000ce135-10331099.pdf?src-supplier=Avnet, ComponentLink7URL=https://datasheet.ciiva.com/10331/aba0000ce135-10331099.pdf?src-supplier=Avnet, ComponentLink8Description=https://datasheet.ciiva.com/17534/aba0000ce135-17534091.pdf?src-supplier=Avnet+Europe, ComponentLink8URL=https://datasheet.ciiva.com/17534/aba0000ce135-17534091.pdf?src-supplier=Avnet+Europe, ComponentLink9Description=https://datasheet.ciiva.com/28678/1244238-28678971.pdf?src-supplier=Element14, ComponentLink9URL=https://datasheet.ciiva.com/28678/1244238-28678971.pdf?src-supplier=Element14, ComponentLink10Description=https://datasheet.ciiva.com/48523/smd-ft-eng-tds-48523629.pdf?src-supplier=Distrelec, ComponentLink10URL=https://datasheet.ciiva.com/48523/smd-ft-eng-tds-48523629.pdf?src-supplier=Distrelec, Contact Plating=Tin, Design Item ID="Cap Pol 220uF", Diameter=6.3mm, Height=7.7mm, Height - Seated (Max)=0.315inch, Lead Diameter=0.65mm, Lead Free="Lead Free", Lead Pitch=1.8mm, Length=7.7mm, Life (Hours)=2000Hour, Mount="Surface Mount", Number of Pins=8, Packaging="Tape and Reel", Pricing 1="1 = 0.76000, 10 = 0.56300, 100 = 0.38580 (USD)", Radiation Hardening=No, REACH SVHC="No SVHC", Ripple Current (AC)=600mA, RoHS=Yes, Source=main.SchLib, Stock 1=366479, Termination=SMD/SMT, Voltage Rating=25V, Voltage Rating (DC)=25V
C35 C36: library part CMP-019-0135-13, "0.1uF 50Volts X7R 10%", Capacitance=100nF, Case Code (Imperial)=0603, Case Code (Metric)=1608, Dielectric=X7R, Max Operating Temperature=125°C, Min Operating Temperature=-55°C, Package Quantity=1, Ratings=AEC-Q200, Tolerance=10%, Voltage Rating=50V, Case/Package=0603, ComponentLink1Description=https://datasheet.ciiva.com/11618/product-11618920.pdf?src-supplier=Avnet, ComponentLink1URL=https://datasheet.ciiva.com/11618/product-11618920.pdf?src-supplier=Avnet, ComponentLink2Description=https://datasheet.ciiva.com/29540/product-29540815.pdf?src-supplier=Digi-Key, ComponentLink2URL=https://datasheet.ciiva.com/29540/product-29540815.pdf?src-supplier=Digi-Key, Depth=0.8mm, Design Item ID="Cap 0603 100nF 2", Height=0.8mm, LatestRevisionDate=29-May-2009, LatestRevisionNote="IPC-7351 Footprint Added.", Lead Free="Lead Free", Length=1.6mm, Mount="Surface Mount", Mouser part=81-GCM188R71H104KA7J, PackageDescription="Chip Capacitor", PackageReference=C1206, Packaging="Tape and Reel", Pricing 1="1=0,31000, 10=0,20900, 50=0,20900, 100=0,11800, 500=0,08300, 1000=0,07300, 2500=0,06400, 5000=0,06000, 10000=0,05300, 20000=0,04800 (USD)", Published=8-Jun-2000, Publisher="Altium Limited", Radiation Hardening=No, RoHS=Yes, Source=main.SchLib, Stock 1=2776503, Termination=SMD/SMT, Thickness=0.035inch, Voltage Rating (DC)=50V, Width=0.031inch
D1: library part CMP-055-0001-A.2, "Rectifier Diode, Schottky, 2 Element, 0.2A, 30V V(RRM), Silicon", Average Rectified Current=200mA, Case/Package=SOT-323, Forward Voltage=800mV, Max Forward Surge Current (Ifsm)=600mA, Max Operating Temperature=125°C, Max Repetitive Reverse Voltage (Vrrm)=30V, Max Reverse Leakage Current=2uA, Min Operating Temperature=-65°C, Package Quantity=1, Power Dissipation=200mW, Contact Plating=Tin,Matte, Element Configuration=Dual, Forward Current=200mA, Height=0.9mm, Lead Free="Lead Free", Length=2.2mm, Max Reverse Voltage (DC)=30V, Max Surge Current=600mA, Mount="Surface Mount", Number of Pins=3, Packaging="Tape and Reel", Peak Non-Repetitive Surge Current=600mA, Peak Reverse Current=2uA, Radiation Hardening=No, REACH SVHC="No SVHC", Recovery Time=5ns, Reverse Recovery Time=5ns, Weight=0.03g, Width=1.35mm
D2 D3: library part CMP-029-0008-3, "Fast Switching Diode, 75 V, 0.3 A, -65 to 150 degC, 2-Pin SOD323, RoHS, Tape and Reel", Average Rectified Current=150mA, Capacitance=2pF, Current=2A, Forward Current=300mA, Forward Voltage=1.25V, Manufacturer=Pericom, Max Operating Temperature=150°C, Max Repetitive Reverse Voltage (Vrrm)=75V, Min Operating Temperature=-65°C, Package Quantity=3000, Peak Reverse Current=1uA, Power Dissipation=200mW, Available Preview Images=2D, ComponentLink1Description="Manufacturer URL", ComponentLink1URL=http://www.diodes.com/, ComponentLink2Description=Datasheet, ComponentLink2URL=http://www.diodes.com/datasheets/ds30097.pdf, ComponentLink3Description=https://datasheet.ciiva.com/16199/ds30097-16199061.pdf?src-supplier=Future+Electronics, ComponentLink3URL=https://datasheet.ciiva.com/16199/ds30097-16199061.pdf?src-supplier=Future+Electronics, ComponentLink4Description=https://datasheet.ciiva.com/16472/ds30097-16472599.pdf?src-supplier=Avnet+Asia, ComponentLink4URL=https://datasheet.ciiva.com/16472/ds30097-16472599.pdf?src-supplier=Avnet+Asia, ComponentLink5Description=https://datasheet.ciiva.com/1179/ds30097-1179355.pdf?src-supplier=Element14, ComponentLink5URL=https://datasheet.ciiva.com/1179/ds30097-1179355.pdf?src-supplier=Element14, ComponentLink6Description=https://datasheet.ciiva.com/8300/ds30097-8300396.pdf?src-supplier=Avnet, ComponentLink6URL=https://datasheet.ciiva.com/8300/ds30097-8300396.pdf?src-supplier=Avnet, ComponentLink7Description=https://datasheet.ciiva.com/911/ds30097-911741.pdf?src-supplier=Digi-Key, ComponentLink7URL=https://datasheet.ciiva.com/911/ds30097-911741.pdf?src-supplier=Digi-Key, ComponentLink8Description=https://datasheet.ciiva.com/911/ds30097-911742.pdf?src-supplier=Digi-Key, ComponentLink8URL=https://datasheet.ciiva.com/911/ds30097-911742.pdf?src-supplier=Digi-Key, ComponentLink9Description=https://datasheet.ciiva.com/25946/ds30097-25946926.pdf?src-supplier=Avnet+Europe, ComponentLink9URL=https://datasheet.ciiva.com/25946/ds30097-25946926.pdf?src-supplier=Avnet+Europe, ComponentLink10Description=https://datasheet.ciiva.com/911/ds30097-911743.pdf?src-supplier=Digi-Key, ComponentLink10URL=https://datasheet.ciiva.com/911/ds30097-911743.pdf?src-supplier=Digi-Key, ComponentLink11Description=http://datasheet.octopart.com/1N4148WS-7-F-Diodes-Inc.-datasheet-11839050.pdf?src-supplier=Newark, ComponentLink11URL=http://datasheet.octopart.com/1N4148WS-7-F-Diodes-Inc.-datasheet-11839050.pdf?src-supplier=Newark, ComponentLink12Description=http://datasheet.octopart.com/1N4148WS-7-F-Diodes-Inc.-datasheet-8329243.pdf?src-supplier=Newark, ComponentLink12URL=http://datasheet.octopart.com/1N4148WS-7-F-Diodes-Inc.-datasheet-8329243.pdf?src-supplier=Newark, ComponentLink13Description=http://datasheet.octopart.com/1N4148WS-7-F-Diodes-Inc.-datasheet-10031541.pdf?src-supplier=Newark, ComponentLink13URL=http://datasheet.octopart.com/1N4148WS-7-F-Diodes-Inc.-datasheet-10031541.pdf?src-supplier=Newark, ComponentLink14Description=http://datasheet.octopart.com/1N4148WS-7-F-Diodes-Inc.-datasheet-34441419.pdf?src-supplier=Allied+Electronics, ComponentLink14URL=http://datasheet.octopart.com/1N4148WS-7-F-Diodes-Inc.-datasheet-34441419.pdf?src-supplier=Allied+Electronics, ComponentLink15Description=http://datasheet.octopart.com/1N4148WS-7-F-Diodes-Inc.-datasheet-62305040.pdf?src-supplier=Element14, ComponentLink15URL=http://datasheet.octopart.com/1N4148WS-7-F-Diodes-Inc.-datasheet-62305040.pdf?src-supplier=Element14, ComponentLink16Description=http://datasheet.octopart.com/1N4148WS-7-F-Diodes-Inc.-datasheet-479.pdf?src-supplier=Mouser, ComponentLink16URL=http://datasheet.octopart.com/1N4148WS-7-F-Diodes-Inc.-datasheet-479.pdf?src-supplier=Mouser, ComponentLink17Description=http://datasheet.octopart.com/1N4148WS-7-F-Diodes-Inc.-datasheet-139480.pdf?src-supplier=Digi-Key, ComponentLink17URL=http://datasheet.octopart.com/1N4148WS-7-F-Diodes-Inc.-datasheet-139480.pdf?src-supplier=Digi-Key, ComponentLink18Description=http://datasheet.octopart.com/1N4148WS-7-F-Diodes-Inc.-datasheet-7284054.pdf?src-supplier=Jameco, ComponentLink18URL=http://datasheet.octopart.com/1N4148WS-7-F-Diodes-Inc.-datasheet-7284054.pdf?src-supplier=Jameco, ComponentLink19Description=http://datasheet.octopart.com/1N4148WS-7-F-Diodes-Inc.-datasheet-14053694.pdf?src-supplier=IIIC, ComponentLink19URL=http://datasheet.octopart.com/1N4148WS-7-F-Diodes-Inc.-datasheet-14053694.pdf?src-supplier=IIIC, ComponentLink20Description=http://datasheet.octopart.com/1N4148WS-7-F-Multicomp-datasheet-21397732.pdf?src-supplier=Newark, ComponentLink20URL=http://datasheet.octopart.com/1N4148WS-7-F-Multicomp-datasheet-21397732.pdf?src-supplier=Newark, ComponentLink21Description=http://datasheet.octopart.com/1N4148WS-7-F-Pericom-datasheet-62305040.pdf?src-supplier=Newark, ComponentLink21URL=http://datasheet.octopart.com/1N4148WS-7-F-Pericom-datasheet-62305040.pdf?src-supplier=Newark, Contact Plating=Tin, Current Rating=150mA, DatasheetVersion="Rev. 25-2, 03/2016", Design Item ID=1N4148WS-7-F, Element Configuration=Single, Height=1mm, Lead Free="Lead Free", Length=1.8mm, Manufacturer Part Number=1N4148WS-7-F, Max Forward Surge Current (Ifsm)=2A, Max Reverse Voltage (DC)=75V, Max Surge Current=2A, Mount="Surface Mount", Number of Pins=2, Output Current=150mA, PackageDescription="2-Pin Small Outline Diode, Body 1.7 x 1.3 mm", PackageReference=SOD323-2, Packaging="Tape and Reel", Peak Non-Repetitive Surge Current=2A, Polarity=Standard, Power Rating=200mW, Pricing 1="1 = 0.19000, 10 = 0.17100, 100 = 0.09320, 500 = 0.05736, 1000 = 0.03911 (USD)", Radiation Hardening=No, REACH SVHC="No SVHC", Recovery Time=4ns, Reverse Recovery Time=4ns, Source=main.SchLib, Stock 1=107341, Voltage=75V, Voltage Rating (DC)=75V, Weight=0.000173oz, Width=1.4mm
D4: library part CMP-029-0000-5, "ON SEMICONDUCTOR - SS14 - DIODE, SCHOTTKY, 1A, 40V, DO-214AC-2", Average Rectified Current=1A, Case/Package=SMA, Forward Voltage=500mV, Manufacturer="ON Semiconductor / Fairchild", Max Forward Surge Current (Ifsm)=40A, Max Operating Temperature=125°C, Max Power Dissipation=1.1W, Max Repetitive Reverse Voltage (Vrrm)=40V, Min Operating Temperature=-65°C, Package Quantity=7500, Peak Reverse Current=200uA, ComponentLink1Description=https://datasheet.ciiva.com/4713/ss14-197224-4713938.pdf?src-supplier=Mouser, ComponentLink1URL=https://datasheet.ciiva.com/4713/ss14-197224-4713938.pdf?src-supplier=Mouser, ComponentLink2Description=https://datasheet.ciiva.com/8303/ss19-8303766.pdf?src-supplier=Avnet, ComponentLink2URL=https://datasheet.ciiva.com/8303/ss19-8303766.pdf?src-supplier=Avnet, ComponentLink3Description=https://datasheet.ciiva.com/910/ss12-910695.pdf?src-supplier=Digi-Key, ComponentLink3URL=https://datasheet.ciiva.com/910/ss12-910695.pdf?src-supplier=Digi-Key, ComponentLink4Description=https://datasheet.ciiva.com/7965/1766303-7965241.pdf?src-supplier=Element14, ComponentLink4URL=https://datasheet.ciiva.com/7965/1766303-7965241.pdf?src-supplier=Element14, ComponentLink5Description=https://datasheet.ciiva.com/910/ss12-910696.pdf?src-supplier=Digi-Key, ComponentLink5URL=https://datasheet.ciiva.com/910/ss12-910696.pdf?src-supplier=Digi-Key, ComponentLink6Description=https://datasheet.ciiva.com/25951/ss19-25951496.pdf?src-supplier=Avnet+Europe, ComponentLink6URL=https://datasheet.ciiva.com/25951/ss19-25951496.pdf?src-supplier=Avnet+Europe, ComponentLink7Description=https://datasheet.ciiva.com/910/ss12-910697.pdf?src-supplier=Digi-Key, ComponentLink7URL=https://datasheet.ciiva.com/910/ss12-910697.pdf?src-supplier=Digi-Key, ComponentLink8Description=https://datasheet.ciiva.com/22651/1880990-22651980.pdf?src-supplier=Element14, ComponentLink8URL=https://datasheet.ciiva.com/22651/1880990-22651980.pdf?src-supplier=Element14, Current=1A, Current Rating=1A, Design Item ID=SS14, Element Configuration=Single, Forward Current=1A, Height=2.2mm, Lead Free="Lead Free", Length=4.75mm, Manufacturer Part Number=SS14, Max Reverse Voltage (DC)=40V, Mount="Surface Mount", Number of Elements=1, Number of Pins=2, Number of Terminals=2, Output Current=1A, Packaging="Tape and Reel", Peak Non-Repetitive Surge Current=40A, Polarity=Standard, Power Dissipation=1.1W, Pricing 1="1 = 0,42000, 10 = 0,29400, 50 = 0,29400, 100 = 0,13500, 1000 = 0,10400, 10000 = 0,08100 (USD)", Radiation Hardening=No, REACH SVHC="No SVHC", RoHS=Yes, Source=main.SchLib, Stock 1=302709, Termination=SMD/SMT, Voltage=40V, Voltage Rating (DC)=40V, Weight=0.003739oz, Width=2.95mm
D5: library part CMP-029-0015-3, "12V Zener", Case/Package=SMA, Manufacturer="Vishay Semiconductors", Max Operating Temperature=150°C, Max Power Dissipation=1W, Max Reverse Leakage Current=5uA, Min Operating Temperature=-65°C, Package Quantity=7500, Tolerance=10%, Zener Voltage=12V, ComponentLink1Description=https://media.digikey.com/pdf/Data%20Sheets/Vishay%20Siliconix%20PDFs/SML4728-SML4764A.pdf?src-supplier=Digi-Key, ComponentLink1URL=https://media.digikey.com/pdf/Data%20Sheets/Vishay%20Siliconix%20PDFs/SML4728-SML4764A.pdf?src-supplier=Digi-Key, ComponentLink2Description=http://www.mouser.com/ds/2/427/sml4728-67952.pdf?src-supplier=Mouser, ComponentLink2URL=http://www.mouser.com/ds/2/427/sml4728-67952.pdf?src-supplier=Mouser, ComponentLink3Description=http://www.vishay.com/docs/85782/sml4728.pdf?src-supplier=Avnet, ComponentLink3URL=http://www.vishay.com/docs/85782/sml4728.pdf?src-supplier=Avnet, Design Item ID=SML4742-E3/5A, Element Configuration=Single, Impedance=9R, Manufacturer Part Number=SML4742-E3/5A, Mount="Surface Mount", Mouser part=78-SML4742-E3/5A, Number of Pins=2, Packaging="Tape and Reel", Power Dissipation=1W, Pricing 1="1 = 0,50000, 10 = 0,42600, 25 = 0,39760, 100 = 0,31800, 250 = 0,29524, 500 = 0,24982, 1000 = 0,19305, 2500 = 0,17602 (USD)", Radiation Hardening=No, RoHS=Yes, Source=main.SchLib, Stock 1=7485, Voltage Tolerance=10%
D6: library part CMP-055-0006-A.3, "Rectifier Diode, Schottky, 1 Phase, 1 Element, 0.5A, 20V V(RRM), Silicon"
J1 J2: library part CMP-028-0060-3, "Jack 1/4 stereo switched - PCBH - chrome nut", Color=Black, Manufacturer=Neutrik, Manufacturer Part Number=NMJ6HCD2, Max Current Rating=3A, Max Operating Temperature=70°C, Min Operating Temperature=-25°C, Package Quantity=200, Voltage Rating=50V, ComponentLink1Description=https://datasheet.ciiva.com/16148/210-217181-16148163.pdf?src-supplier=Onlinecomponents.com, ComponentLink1URL=https://datasheet.ciiva.com/16148/210-217181-16148163.pdf?src-supplier=Onlinecomponents.com, ComponentLink2Description=http://datasheet.octopart.com/NMJ6HCD2-Neutrik-datasheet-46041.pdf?src-supplier=Allied+Electronics, ComponentLink2URL=http://datasheet.octopart.com/NMJ6HCD2-Neutrik-datasheet-46041.pdf?src-supplier=Allied+Electronics, ComponentLink3Description=http://datasheet.octopart.com/NMJ6HCD2-Neutrik-datasheet-66533984.pdf?src-supplier=Newark, ComponentLink3URL=http://datasheet.octopart.com/NMJ6HCD2-Neutrik-datasheet-66533984.pdf?src-supplier=Newark, Contact Material=Chrome, Contact Plating=Silver, Darkglass part=D00-0011, Depth=18.2mm, Design Item ID="Jack NMJ6HCD2", Gender=Female, Housing Material=Polyamide, Mount="Through Hole", Number of Contacts=2, Number of Ports=1, Number of Terminals=6, Orientation=Straight, Pricing 1="1 = 1.74000, 10 = 1.57000, 50 = 1.37000, 100 = 1.32000, 1000 = 1.24000, 10000 = 1.24000 (USD)", Selective Soldering=YES, Source=main.SchLib, Stock 1=16927, Supplied by Darkglass=YES, Termination=Solder, Weight=0.282192oz
J3: library part CMP-034-0002-1, "Low Voltage Power Supply Connector", ComponentLink1Description="Manufacturer Link", ComponentLink1URL=http://domino.kycon.com/internet/Products.html, Darkglass part=D00-0019, Design Item ID="DC Jack TH", Selective Soldering=Yes, Source=main.SchLib, Supplied by Darkglass=Yes
J4: library part CMP-2000-05181-2, "PC TEST POINT MINIATURE BLACK", Color=Black, Flammability Rating="UL94 V-0", Package Quantity=100, Body Material=Bronze, Contact Material=Bronze, Contact Plating=Silver, Diameter=2.54mm, Height=0.3inch, Hole Diameter=1.6mm, Housing Color=Black, Inside Diameter=1.27mm, Insulation=Insulated, Insulation Material=Nylon, Lead Free="Lead Free", Length=7.62mm, Material=Nylon, Mount="Through Hole", Number of Contacts=1, Number of Ports=1, Orientation=Straight, Outside Diameter=2.54mm, Packaging=Bulk, Plating=Silver, REACH SVHC="No SVHC", RoHS Compliant=Yes, Series=THM, Termination="Through Hole"
L1 L2: library part CMP-027-0005-1, "Fixed Inductors 15uH 20% 0.48ohm 0.98A AEC-Q200"
LDR1: "Ambient Light Sensors Hermetic Photocell"
LED1: library part CMP-036-0000-2, "THT LED round mono-color waterclear, WL-TMRW , RED", Emitting Color=RED, Manufacturer="Wuerth Elektronik", PartNumber=151034rs03000, Available Preview Images=2D, ComponentLink1Description="Manufacturer URL", ComponentLink1URL=http://www.we-online.com, ComponentLink2Description=Datasheet, ComponentLink2URL=http://katalog.we-online.de/pbs/datasheet/7448042001.pdfhttp://katalog.we-online.de/pbs/datasheet/7448042001.pdfhttp://katalog.we-online.de/pbs/datasheet/7448042001.pdfhttp://katalog.we-online.de/pbs/datasheet/151033BS03000.pdf, Darkglass=D00-0042, Darkglass part=D00-0042, Design Item ID="LED 3mm RED", Fitted=Fitted, Mouser part=710-151034RS03000, PackageReference="Type 3mm", Selective Soldering=YES, Source=main.SchLib, Supplied by Darkglass=YES
R1: library part CMP-03751-1, "Resistor 1k +-1% 1206 Thin film 0.25W +-50ppm/°C", Maximum working voltage=200V, Power=250mW, Resistance=1k, Temperature Coefficient (ppm/°C)=50, Tolerance (+-)=1%, Composition="Thin film", Size (Imperial)=1206
R2: library part CMP-04068-2, "Resistor 1M +-1% 1206 Thin film 0.25W +-50ppm/°C", Maximum working voltage=200V, Power=250mW, Resistance=1M, Temperature Coefficient (ppm/°C)=50, Tolerance (+-)=1%, Composition="Thin film", Size (Imperial)=1206
R3: library part CMP-04019-2, "Resistor 330k +-1% 1206 Thin film 0.25W +-50ppm/°C", Case Code (Imperial)=0805, Case Code (Metric)=2012, Max Operating Temperature=125°C, Max Power Dissipation=125mW, Min Operating Temperature=-55°C, Package Quantity=5000, Resistance=330kR, Temperature Coefficient=50ppm/°C, Tolerance=1%, Voltage Rating=150V, Case/Package=0805, ComponentLink1Description=https://datasheet.ciiva.com/5990/1392914-5990598.pdf?src-supplier=Farnell, ComponentLink1URL=https://datasheet.ciiva.com/5990/1392914-5990598.pdf?src-supplier=Farnell, ComponentLink2Description=https://datasheet.ciiva.com/5990/1392914-5990601.pdf?src-supplier=Farnell, ComponentLink2URL=https://datasheet.ciiva.com/5990/1392914-5990601.pdf?src-supplier=Farnell, ComponentLink3Description=https://datasheet.ciiva.com/2561/pyu-rt-1-to-0-05-rohs-l-5-2561162.pdf?src-supplier=Digi-Key, ComponentLink3URL=https://datasheet.ciiva.com/2561/pyu-rt-1-to-0-05-rohs-l-5-2561162.pdf?src-supplier=Digi-Key, Composition="Thin Film", Contact Plating=Tin, Depth=1.25mm, Design Item ID="Res 0805 330k 1%", Height=0.024inch, LatestRevisionDate=17-Jul-2002, LatestRevisionNote="Re-released for DXP Platform.", Lead Free="Lead Free", Length=0.079inch, Military Standard=Not, Number of Pins=2, Number of Terminations=2, PackageDescription="Axial Device, Thru-Hole; 2 Leads; 0.5 in Pin Spacing", PackageReference=AXIAL-0.5, Packaging="Tape and Reel", Power Rating=125mW, Pricing 1="1 = 0,10000, 10 = 0,09300, 100 = 0,03580, 1000 = 0,01573, 2500 = 0,01358 (USD)", Published=8-Jun-2000, Publisher="Altium Limited", Radiation Hardening=No, REACH SVHC="No SVHC", RoHS=Yes, Source=main.SchLib, Stock 1=1168, Termination=SMD/SMT, Voltage Rating (DC)=150V, Width=0.049inch
R4 R5 R7 R9 R10 R12 R13: library part CMP-03968-2, "Resistor 100k +-1% 1206 Thin film 0.25W +-50ppm/°C", Maximum working voltage=200V, Power=250mW, Resistance=100k, Temperature Coefficient (ppm/°C)=50, Tolerance (+-)=1%, Composition="Thin film", Size (Imperial)=1206
R6: library part CMP-03808-2, "Resistor 3.3k +-1% 1206 Thin film 0.25W +-50ppm/°C", Maximum working voltage=150V, Power=125mW, Resistance=3.3k, Temperature Coefficient (ppm/°C)=50, Tolerance (+-)=1%, Composition="Thin film", Size (Imperial)=0805
R8 R26 R27: library part CMP-03662-2, "Resistor 100R +-1% 1206 Thin film 0.25W +-50ppm/°C", Maximum working voltage=200V, Power=250mW, Resistance=100, Temperature Coefficient (ppm/°C)=50, Tolerance (+-)=1%, Composition="Thin film", Size (Imperial)=1206